# Altium PCB board.PcbDoc
Units mm, origin at the board's own origin, x right, y up, seen from the top; angles counter-clockwise.
Board outline 91.32 x 58.35 mm, 2 copper layers (Top Layer, Bottom Layer), stack 1.58 mm thick; 10 components, 8 nets, 62 pads, 1123 vias.
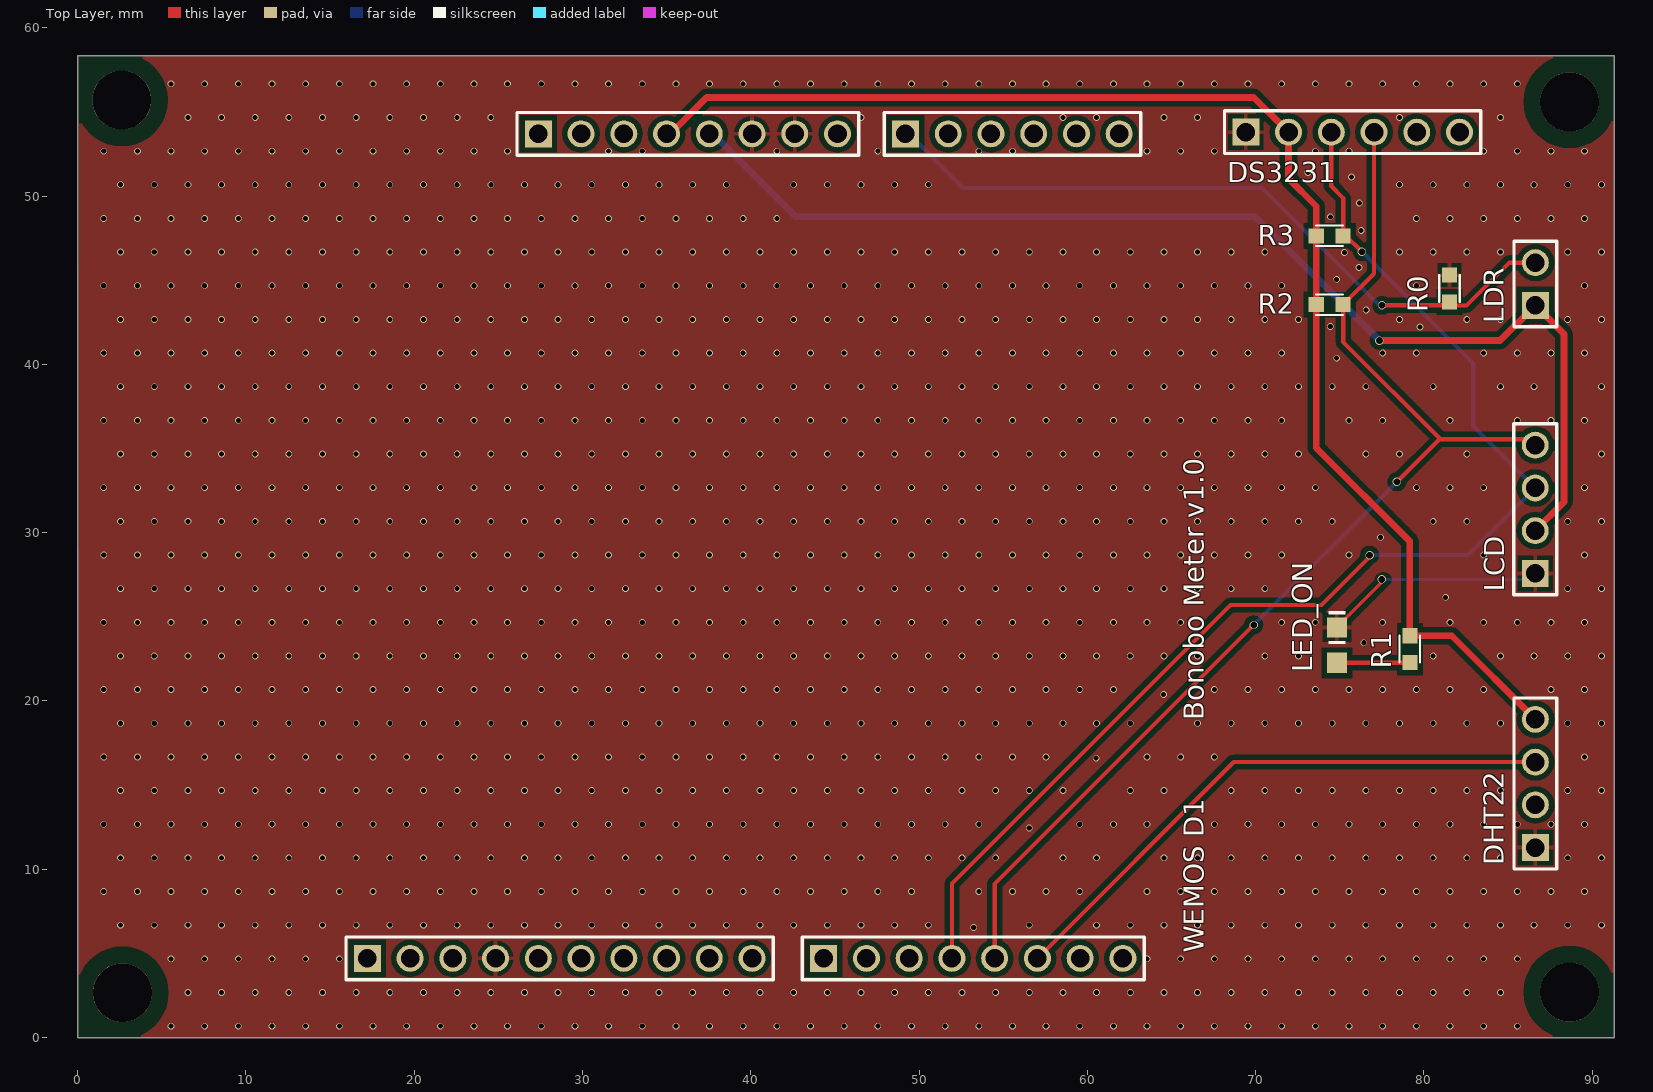
[diagram p0: Top Layer view]
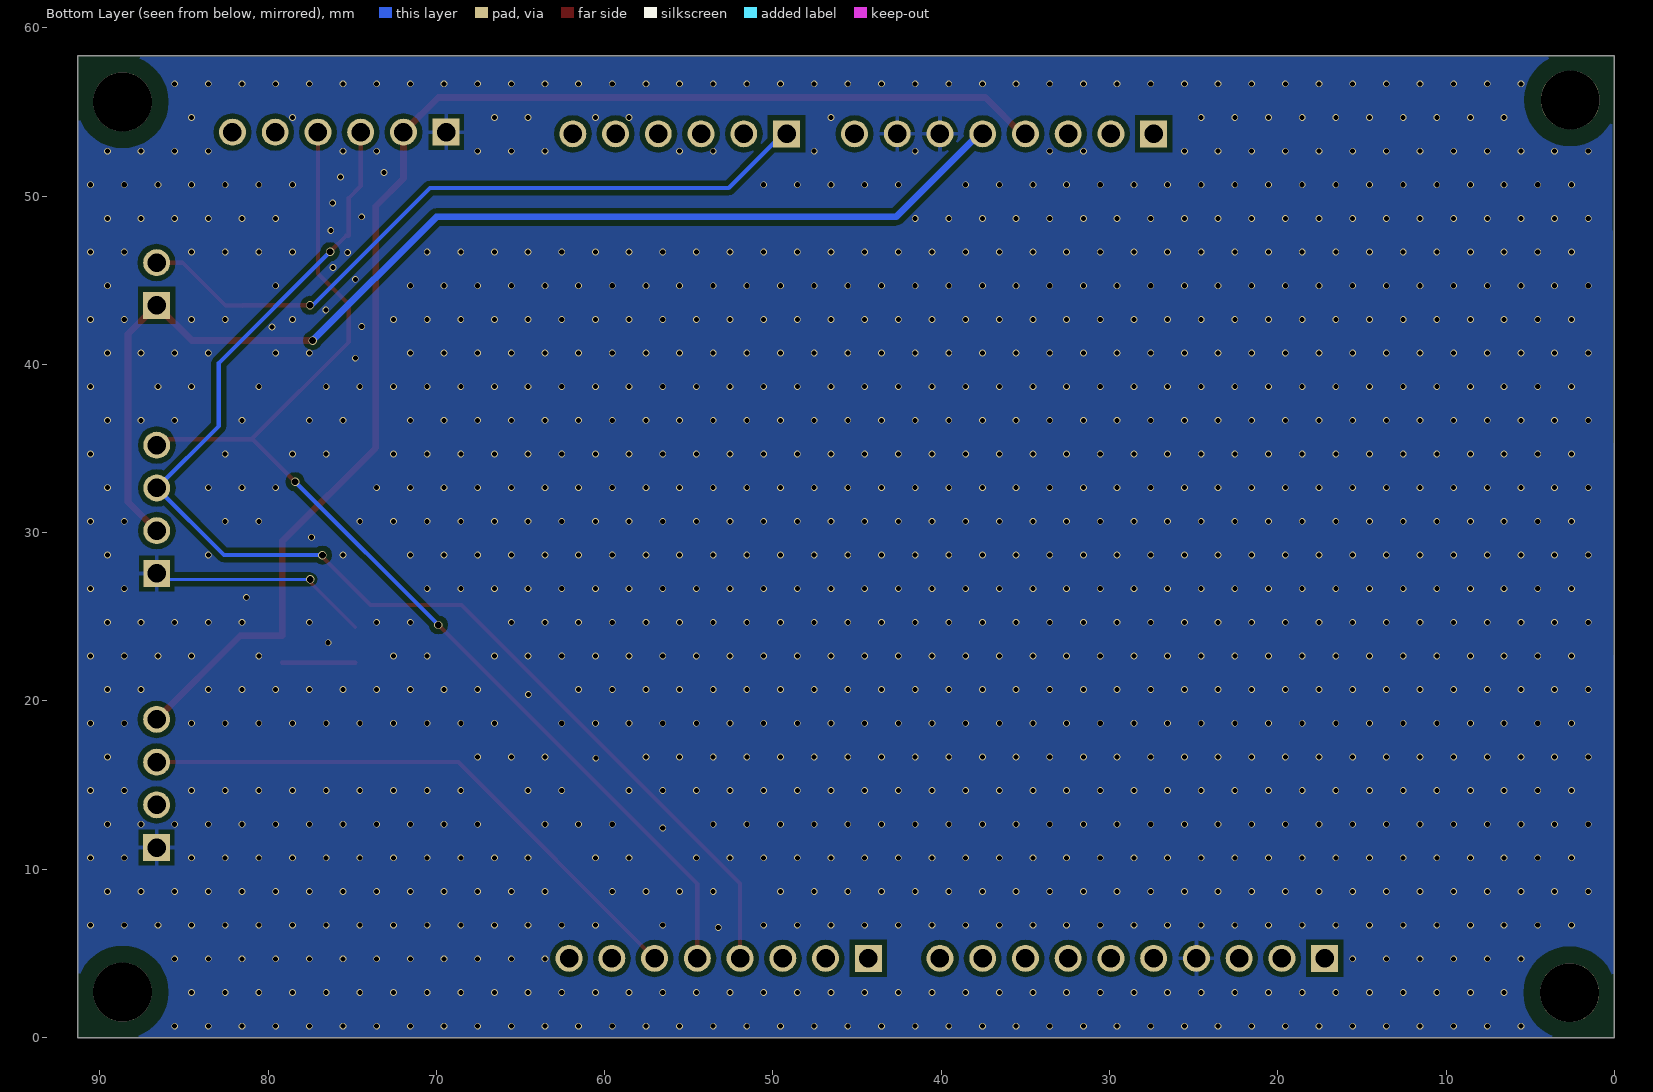
[diagram p1: Bottom Layer view, seen from below]

## Layer stack, top to bottom
Top Solder: solder mask 0.0102, Solder Resist, Dk 3.5
Top Layer: signal copper 0.0356
Dielectric 1: dielectric 1.5087, FR-4, Dk 4.8
Bottom Layer: signal copper 0.0356
Bottom Solder: solder mask 0.0102, Solder Resist, Dk 3.5

## Board outline
0,0 0,58.351 91.322,58.351 91.322,0

## Design rules (kind name [scope] priority, off if disabled: settings)
Clearance Clearance_Screw_Hole [HoleSize > 3] p1: gap=0.152 ignorepadtopadclearanceinfootprint=FALSE except(0.305: Arc-Poly Track-Poly SMDPad-Poly Via-Poly Fill-Poly Poly-Poly; 0.5: Poly-Hole; 1: THPad-Poly)
Clearance Clearance_Borders [OnLayer('Mechanical 1')] p2: gap=0.152 ignorepadtopadclearanceinfootprint=FALSE except(0.305: Arc-Poly Track-Poly SMDPad-Poly Via-Poly Fill-Poly Poly-Poly; 0.5: Poly-Hole; 1: THPad-Poly)
Clearance Clearance_RF [InNet('RF')] p3: gap=0.15 ignorepadtopadclearanceinfootprint=FALSE except(0: Arc-Hole Track-Hole SMDPad-Hole THPad-Hole Via-Hole Fill-Hole Poly-Hole Region-Hole Text-Hole; 0.4: Arc-Via Arc-Poly Track-Poly SMDPad-Poly THPad-Poly Via-Poly Fill-Poly Poly-Poly)
Clearance [All] p4: gap=0.152 ignorepadtopadclearanceinfootprint=FALSE except(0.305: Arc-Poly Track-Poly SMDPad-Poly THPad-Poly Via-Poly Fill-Poly Poly-Poly)
DiffPairsRouting [All] p1: maxlimit=0.254 minlimit=0.25 mostfreqgap=0.25 toplayer_minwidth=0.25 toplayer_maxwidth=0.25 toplayer_prefwidth=0.25 bottomlayer_minwidth=0.25 bottomlayer_maxwidth=0.25 bottomlayer_prefwidth=0.25 maxuncoupledlength=12.7
HoleSize [All] p1: absolutevalues=TRUE maxlimit=10 minlimit=0.025 maxpercent=80.000 minpercent=20.000
MinimumSolderMaskSliver [All] p1: minsoldermaskwidth=0.05
PlaneClearance PlaneClearance_RF [InNet('WLAN_RF')] p1: clearance=0.8
PlaneClearance [All] p2: clearance=0.5
PlaneConnect [All] p1: planeconnectstyle=Relief reliefexpansion=0.508 reliefentries=2 reliefconductorwidth=0.254 reliefairgap=0.254
PolygonConnect PolygonConnect_vias [All vs IsVia] p1: connectstyle=Direct reliefconductorwidth=0.254 reliefentries=4 polygonreliefangle="90 Angle" airgapwidth=0.254
PolygonConnect [All] p2: connectstyle=Relief reliefconductorwidth=0.25 reliefentries=4 polygonreliefangle="90 Angle" airgapwidth=0.25
RoutingVias [All] p1: holewidth=0.7 width=0.5 viastyle="Through Hole" minholewidth=0.3 minwidth=0.4 maxholewidth=0.4 maxwidth=0.8
SilkToSolderMaskClearance [IsPad] p1: minsilkscreentomaskgap=0 clearancetoexposedcopper=TRUE
SolderMaskExpansion SolderMaskExpansion_Vias [IsVia] p1: expansion=-10
SolderMaskExpansion [All] p2: expansion=0.1
UnpouredPolygon [All] p1: allowunpoured=TRUE allowshelved=TRUE
Width [All] p1: maxlimit=2 minlimit=0.1 preferedwidth=0.25 minimp=50.000000 maximp=50.000000 favimp=50.000000
23 further rules are at their usual default settings.

## Components (designator, comment, footprint, x,y, rotation, side; value= is the part's Value field where it differs from the comment)
DHT22 "04p" 61300411121 86.626,15.097 r90 top
DS3231 "06p" 61300611121 75.768,53.801 r0 top
LCD "04p" 61300411121 86.618,31.388 r90 top
LDR "02p" 61300211121 86.626,44.777 r90 top
LED_ON "" CHIPLED_0805 74.828,23.319 r0 top
R0 "R-US_R0603" R0603 81.519,44.504 r270 top value=5K
R1 "R-US_R0603" R0603 79.168,23.077 r90 top value=470
R2 "R-US_R0603" R0603 74.403,43.555 r180 top value=10K
R3 "R-US_R0603" R0603 74.403,47.64 r180 top value=10K
"WEMOS D1" "WEMOS D1" "WEMOS D1" 39.554,29.203 r0 top (schematic designator U0)

## Footprints (in the part's own frame and the unit in brackets; to place one, negate y for a bottom-side part, rotate by r counter-clockwise, add the part's x,y. Pads: shape width x height; smd on the part's side, far side on the other; paste and mask are expansions set on the pad)
61300211121 [mm] "2 pins, 1 row, straight, gold plating"
  rect 1.6x1.6 hole 1.1: 1(-1.27,0)
  round 1.6 hole 1.1: 2(1.27,0)
  silkscreen extent -2.54,-1.27 2.54,1.27, body extent -2.54,-1.27 2.54,1.27, height 8.57
61300411121 [mm] "4 pins, 1 row, straight, gold plating"
  rect 1.6x1.6 hole 1.1: 1(-3.81,0)
  round 1.6 hole 1.1: 2(-1.27,0) 3(1.27,0) 4(3.81,0)
  silkscreen extent -5.08,-1.27 5.08,1.27, body extent -5.08,-1.27 5.08,1.27, height 8.57
61300611121 [mm] "6 pins, 1 row, straight, gold plating"
  rect 1.6x1.6 hole 1.1: 1(-6.35,0)
  round 1.6 hole 1.1: 2(-3.81,0) 3(-1.27,0) 4(1.27,0) 5(3.81,0) 6(6.35,0)
  silkscreen extent -7.62,-1.27 7.62,1.27, body extent -7.62,-1.27 7.62,1.27, height 8.57
CHIPLED_0805 [mm]
  rect 1.2x1.2 smd: A(0,-1.05) C(0,1.05)
  silkscreen extent -0.51,0.05 0.51,2.03, body extent -0.63,-1 0.62,1, height 0.81
R0603 [mm]
  rect 0.9x0.9 smd: 1(-0.8,0) 2(0.8,0)
  silkscreen extent -0.8,-0.61 0.8,0.61, body extent -0.77,-0.42 0.78,0.43, height 0.45
"WEMOS D1" [mm] "WEMOS D1 R2 ESP8266 Board"
  rect 1.6x1.6 hole 1.1: 1(-12.18,24.5) 9(9.64,24.5) 15(-22.34,-24.5) 25(4.78,-24.5)
  round 1.6 hole 1.1: 2(-9.64,24.5) 3(-7.1,24.5) 4(-4.56,24.5) 5(-2.02,24.5) 6(0.52,24.5) 7(3.06,24.5) 8(5.6,24.5) 10(12.18,24.5) 11(14.72,24.5) 12(17.26,24.5) 13(19.8,24.5) 14(22.34,24.5) 16(-19.8,-24.5) 17(-17.26,-24.5) 18(-14.72,-24.5) 19(-12.18,-24.5) 20(-9.64,-24.5) 21(-7.1,-24.5) 22(-4.56,-24.5) 23(-2.02,-24.5) 24(0.52,-24.5) 26(7.32,-24.5) 27(9.86,-24.5) 28(12.4,-24.5) 29(14.94,-24.5) 30(17.48,-24.5) 31(20.02,-24.5) 32(22.56,-24.5)
  silkscreen extent -23.61,-25.77 23.83,25.77, body extent -23.61,-25.77 23.83,25.77, height 8.57

## Part data
DHT22 LCD: library part 61300411121, "WR-PHD 2.54 mm THT Pin Header, 04p", Part Number=61300411121, Vendor="Wurth Elektronik"
DS3231: library part 61300611121, "WR-PHD 2.54 mm THT Pin Header, 06p", Part Number=61300611121, Vendor="Wurth Elektronik"
LDR: library part 61300211121, "WR-PHD 2.54 mm THT Pin Header, 02p", Part Number=61300211121, Vendor="Wurth Elektronik"
LED_ON: library part LEDCHIPLED_0805, Colour=Vermelho, Part Number=AP2012EC, Família=LEDs, Vendor=Kingbright
R0 R1 R2 R3: Part Number=RC0603FR-07470RL, Família=Resistores, Vendor=Yageo
"WEMOS D1": "Arduino UNO Compatible wifi board based on ESP8266EX", Part Number="WEMOS D1"

## Free pads (board coordinates)
  round 3.5 hole 3.5: ""(2.62,55.715) ""(2.657,2.66) ""(88.653,2.697) ""(88.653,55.603)

## Via types
v1: diameter 0.4, hole 0.3, Top Layer to Bottom Layer, tented both sides, 1116 vias
v2: diameter 0.5, hole 0.4, Top Layer to Bottom Layer, 7 vias

## Nets (pads, with @x,y where several pads share a name; then routed paths per layer and width w, separated by ;. In a path a pad name is that pad's centre, name@x,y a point inside that pad or via, vN(x,y) a via of type N, cw(c..) or ccw(c..) an arc to the next point about the centre after c; other vN are vias at no path point)
+3V3: "WEMOS D1.4" DHT22.4 DS3231.2 R1.2 R2.2 R3.2 | length 80.9
  Top Layer w0.4: 35.214,53.703 37.379,55.867 69.892,55.867 DS3231.2 71.958,51.042 73.603,49.396 R3.2 R2.2 73.603,35.044 79.168,29.479 R1.2 81.656,23.877 DHT22.4
+5V: "WEMOS D1.5" LCD.2 LDR.1 | length 69.6
  Top Layer w0.4: v2(77.357,41.414) 84.534,41.414 LDR.1 88.323,41.81 88.323,31.824 LCD.2
  Bottom Layer w0.4: 37.754,53.703 42.69,48.767 70.004,48.767 v2(77.357,41.414)
DHT_DATA: "WEMOS D1.30" DHT22.3 | length 34.4
  Top Layer w0.25: 57.034,4.703 68.698,16.367 DHT22.3
GND: "WEMOS D1.6" "WEMOS D1.7" "WEMOS D1.18" DHT22.1 DS3231.1 LCD.1 LED_ON.C R0.1 | length 13.5
  Top Layer w0.2: LED_ON.C 77.68,27.221 v2(77.494,27.221)
  Bottom Layer w0.2: v2(77.494,27.221) 86.261,27.221 LCD.1
  other v1: 5.55,0.675 7.55,0.675 9.55,0.675 11.55,0.675 13.55,0.675 15.55,0.675 17.55,0.675 19.55,0.675 21.55,0.675 23.55,0.675 25.55,0.675 27.55,0.675 29.55,0.675 31.55,0.675 33.55,0.675 35.55,0.675 37.55,0.675 39.55,0.675 41.55,0.675 43.55,0.675 45.55,0.675 47.55,0.675 49.55,0.675 51.55,0.675 53.55,0.675 55.55,0.675 57.55,0.675 59.55,0.675 61.55,0.675 63.55,0.675 65.55,0.675 67.55,0.675 69.55,0.675 71.55,0.675 73.55,0.675 75.55,0.675 77.55,0.675 79.55,0.675 81.55,0.675 83.55,0.675 85.55,0.675 6.55,2.675 8.55,2.675 10.55,2.675 12.55,2.675 14.55,2.675 16.55,2.675 18.55,2.675 20.55,2.675 22.55,2.675 24.55,2.675 26.55,2.675 28.55,2.675 30.55,2.675 32.55,2.675 34.55,2.675 36.55,2.675 38.55,2.675 40.55,2.675 42.55,2.675 44.55,2.675 46.55,2.675 48.55,2.675 50.55,2.675 52.55,2.675 54.55,2.675 56.55,2.675 58.55,2.675 60.55,2.675 62.55,2.675 64.55,2.675 66.55,2.675 68.55,2.675 70.55,2.675 72.55,2.675 74.55,2.675 76.55,2.675 78.55,2.675 80.55,2.675 82.55,2.675 84.55,2.675 5.55,4.675 7.55,4.675 9.55,4.675 11.55,4.675 13.55,4.675 15.55,4.675 63.55,4.675 65.55,4.675 67.55,4.675 69.55,4.675 71.55,4.675 73.55,4.675 75.55,4.675 77.55,4.675 79.55,4.675 81.55,4.675 83.55,4.675 85.55,4.675 53.25,6.537 2.55,6.675 4.55,6.675 6.55,6.675 8.55,6.675 10.55,6.675 12.55,6.675 14.55,6.675 16.55,6.675 18.55,6.675 20.55,6.675 22.55,6.675 24.55,6.675 26.55,6.675 28.55,6.675 30.55,6.675 32.55,6.675 34.55,6.675 36.55,6.675 38.55,6.675 40.55,6.675 42.55,6.675 44.55,6.675 46.55,6.675 48.55,6.675 50.55,6.675 56.55,6.675 60.55,6.675 62.55,6.675 64.55,6.675 66.55,6.675 68.55,6.675 70.55,6.675 72.55,6.675 74.55,6.675 76.55,6.675 78.55,6.675 80.55,6.675 82.55,6.675 84.55,6.675 86.55,6.675 88.55,6.675 90.55,6.675 1.55,8.675 3.55,8.675 5.55,8.675 7.55,8.675 9.55,8.675 11.55,8.675 13.55,8.675 15.55,8.675 17.55,8.675 19.55,8.675 21.55,8.675 23.55,8.675 25.55,8.675 27.55,8.675 29.55,8.675 31.55,8.675 33.55,8.675 35.55,8.675 37.55,8.675 39.55,8.675 41.55,8.675 43.55,8.675 45.55,8.675 47.55,8.675 49.55,8.675 53.55,8.675 55.55,8.675 57.55,8.675 59.55,8.675 63.55,8.675 65.55,8.675 67.55,8.675 69.55,8.675 71.55,8.675 73.55,8.675 75.55,8.675 77.55,8.675 79.55,8.675 81.55,8.675 83.55,8.675 85.55,8.675 87.55,8.675 89.55,8.675 2.55,10.675 4.55,10.675 6.55,10.675 8.55,10.675 10.55,10.675 12.55,10.675 14.55,10.675 16.55,10.675 18.55,10.675 20.55,10.675 22.55,10.675 24.55,10.675 26.55,10.675 28.55,10.675 30.55,10.675 32.55,10.675 34.55,10.675 36.55,10.675 38.55,10.675 40.55,10.675 42.55,10.675 44.55,10.675 46.55,10.675 48.55,10.675 50.55,10.675 52.55,10.675 54.55,10.675 58.55,10.675 60.55,10.675 64.55,10.675 66.55,10.675 68.55,10.675 70.55,10.675 72.55,10.675 74.55,10.675 76.55,10.675 78.55,10.675 80.55,10.675 82.55,10.675 84.55,10.675 88.55,10.675 90.55,10.675 56.549,12.457 1.55,12.675 3.55,12.675 5.55,12.675 7.55,12.675 9.55,12.675 11.55,12.675 13.55,12.675 15.55,12.675 17.55,12.675 19.55,12.675 21.55,12.675 23.55,12.675 25.55,12.675 27.55,12.675 29.55,12.675 31.55,12.675 33.55,12.675 35.55,12.675 37.55,12.675 39.55,12.675 41.55,12.675 43.55,12.675 45.55,12.675 47.55,12.675 49.55,12.675 51.55,12.675 53.55,12.675 59.55,12.675 61.55,12.675 63.55,12.675 67.55,12.675 69.55,12.675 71.55,12.675 73.55,12.675 75.55,12.675 77.55,12.675 79.55,12.675 81.55,12.675 83.55,12.675 85.55,12.675 87.55,12.675 89.55,12.675 2.55,14.675 4.55,14.675 6.55,14.675 8.55,14.675 10.55,14.675 12.55,14.675 14.55,14.675 16.55,14.675 18.55,14.675 20.55,14.675 22.55,14.675 24.55,14.675 26.55,14.675 28.55,14.675 30.55,14.675 32.55,14.675 34.55,14.675 36.55,14.675 38.55,14.675 40.55,14.675 42.55,14.675 44.55,14.675 46.55,14.675 48.55,14.675 50.55,14.675 52.55,14.675 54.55,14.675 56.55,14.675 58.55,14.675 62.55,14.675 64.55,14.675 68.55,14.675 70.55,14.675 72.55,14.675 74.55,14.675 76.55,14.675 78.55,14.675 80.55,14.675 82.55,14.675 84.55,14.675 88.55,14.675 90.55,14.675 60.528,16.598 1.55,16.675 3.55,16.675 5.55,16.675 7.55,16.675 9.55,16.675 11.55,16.675 13.55,16.675 15.55,16.675 17.55,16.675 19.55,16.675 21.55,16.675 23.55,16.675 25.55,16.675 27.55,16.675 29.55,16.675 31.55,16.675 33.55,16.675 35.55,16.675 37.55,16.675 39.55,16.675 41.55,16.675 43.55,16.675 45.55,16.675 47.55,16.675 49.55,16.675 51.55,16.675 53.55,16.675 55.55,16.675 57.55,16.675 63.55,16.675 65.55,16.675 67.55,16.675 89.55,16.675 2.55,18.675 4.55,18.675 6.55,18.675 8.55,18.675 10.55,18.675 12.55,18.675 14.55,18.675 16.55,18.675 18.55,18.675 20.55,18.675 22.55,18.675 24.55,18.675 26.55,18.675 28.55,18.675 30.55,18.675 32.55,18.675 34.55,18.675 36.55,18.675 38.55,18.675 40.55,18.675 42.55,18.675 44.55,18.675 46.55,18.675 48.55,18.675 50.55,18.675 52.55,18.675 54.55,18.675 56.55,18.675 58.55,18.675 60.55,18.675 62.55,18.675 66.55,18.675 68.55,18.675 70.55,18.675 72.55,18.675 74.55,18.675 76.55,18.675 78.55,18.675 80.55,18.675 82.55,18.675 84.55,18.675 88.55,18.675 90.55,18.675 64.539,20.383 1.55,20.675 3.55,20.675 5.55,20.675 7.55,20.675 9.55,20.675 11.55,20.675 13.55,20.675 15.55,20.675 17.55,20.675 19.55,20.675 21.55,20.675 23.55,20.675 25.55,20.675 27.55,20.675 29.55,20.675 31.55,20.675 33.55,20.675 35.55,20.675 37.55,20.675 39.55,20.675 41.55,20.675 43.55,20.675 45.55,20.675 47.55,20.675 49.55,20.675 51.55,20.675 53.55,20.675 55.55,20.675 57.55,20.675 59.55,20.675 61.55,20.675 67.55,20.675 69.55,20.675 71.55,20.675 73.55,20.675 75.55,20.675 77.55,20.675 79.55,20.675 81.55,20.675 83.55,20.675 87.55,20.675 89.55,20.675 2.55,22.675 4.55,22.675 6.55,22.675 8.55,22.675 10.55,22.675 12.55,22.675 14.55,22.675 16.55,22.675 18.55,22.675 20.55,22.675 22.55,22.675 24.55,22.675 26.55,22.675 28.55,22.675 30.55,22.675 32.55,22.675 34.55,22.675 36.55,22.675 38.55,22.675 40.55,22.675 42.55,22.675 44.55,22.675 46.55,22.675 48.55,22.675 50.55,22.675 52.55,22.675 54.55,22.675 56.55,22.675 58.55,22.675 60.55,22.675 62.55,22.675 64.55,22.675 66.55,22.675 70.55,22.675 72.55,22.675 80.55,22.675 84.55,22.675 86.55,22.675 88.55,22.675 90.55,22.675 76.432,23.46 1.55,24.675 3.55,24.675 5.55,24.675 7.55,24.675 9.55,24.675 11.55,24.675 13.55,24.675 15.55,24.675 17.55,24.675 19.55,24.675 21.55,24.675 23.55,24.675 25.55,24.675 27.55,24.675 29.55,24.675 31.55,24.675 33.55,24.675 35.55,24.675 37.55,24.675 39.55,24.675 41.55,24.675 43.55,24.675 45.55,24.675 47.55,24.675 49.55,24.675 51.55,24.675 53.55,24.675 55.55,24.675 57.55,24.675 59.55,24.675 61.55,24.675 63.55,24.675 65.55,24.675 71.55,24.675 73.55,24.675 77.55,24.675 81.55,24.675 83.55,24.675 85.55,24.675 87.55,24.675 89.55,24.675 81.293,26.158 2.55,26.675 4.55,26.675 6.55,26.675 8.55,26.675 10.55,26.675 12.55,26.675 14.55,26.675 16.55,26.675 18.55,26.675 20.55,26.675 22.55,26.675 24.55,26.675 26.55,26.675 28.55,26.675 30.55,26.675 32.55,26.675 34.55,26.675 36.55,26.675 38.55,26.675 40.55,26.675 42.55,26.675 44.55,26.675 46.55,26.675 48.55,26.675 50.55,26.675 52.55,26.675 54.55,26.675 56.55,26.675 58.55,26.675 60.55,26.675 62.55,26.675 64.55,26.675 66.55,26.675 68.55,26.675 70.55,26.675 88.55,26.675 90.55,26.675 1.55,28.675 3.55,28.675 5.55,28.675 7.55,28.675 9.55,28.675 11.55,28.675 13.55,28.675 15.55,28.675 17.55,28.675 19.55,28.675 21.55,28.675 23.55,28.675 25.55,28.675 27.55,28.675 29.55,28.675 31.55,28.675 33.55,28.675 35.55,28.675 37.55,28.675 39.55,28.675 41.55,28.675 43.55,28.675 45.55,28.675 47.55,28.675 49.55,28.675 51.55,28.675 53.55,28.675 55.55,28.675 57.55,28.675 59.55,28.675 61.55,28.675 63.55,28.675 65.55,28.675 67.55,28.675 69.55,28.675 71.55,28.675 75.55,28.675 83.55,28.675 89.55,28.675 77.428,29.73 2.55,30.675 4.55,30.675 6.55,30.675 8.55,30.675 10.55,30.675 12.55,30.675 14.55,30.675 16.55,30.675 18.55,30.675 20.55,30.675 22.55,30.675 24.55,30.675 26.55,30.675 28.55,30.675 30.55,30.675 32.55,30.675 34.55,30.675 36.55,30.675 38.55,30.675 40.55,30.675 42.55,30.675 44.55,30.675 46.55,30.675 48.55,30.675 50.55,30.675 52.55,30.675 54.55,30.675 56.55,30.675 58.55,30.675 60.55,30.675 62.55,30.675 64.55,30.675 66.55,30.675 68.55,30.675 70.55,30.675 72.55,30.675 74.55,30.675 80.55,30.675 82.55,30.675 88.55,30.675 90.55,30.675 1.55,32.675 3.55,32.675 5.55,32.675 7.55,32.675 9.55,32.675 11.55,32.675 13.55,32.675 15.55,32.675 17.55,32.675 19.55,32.675 21.55,32.675 23.55,32.675 25.55,32.675 27.55,32.675 29.55,32.675 31.55,32.675 33.55,32.675 35.55,32.675 37.55,32.675 39.55,32.675 41.55,32.675 43.55,32.675 45.55,32.675 47.55,32.675 49.55,32.675 51.55,32.675 53.55,32.675 55.55,32.675 57.55,32.675 59.55,32.675 61.55,32.675 63.55,32.675 65.55,32.675 67.55,32.675 69.55,32.675 71.55,32.675 73.55,32.675 79.55,32.675 81.55,32.675 83.55,32.675 89.55,32.675 2.55,34.675 4.55,34.675 6.55,34.675 8.55,34.675 10.55,34.675 12.55,34.675 14.55,34.675 16.55,34.675 18.55,34.675 20.55,34.675 22.55,34.675 24.55,34.675 26.55,34.675 28.55,34.675 30.55,34.675 32.55,34.675 34.55,34.675 36.55,34.675 38.55,34.675 40.55,34.675 42.55,34.675 44.55,34.675 46.55,34.675 48.55,34.675 50.55,34.675 52.55,34.675 54.55,34.675 56.55,34.675 58.55,34.675 60.55,34.675 62.55,34.675 64.55,34.675 66.55,34.675 68.55,34.675 70.55,34.675 72.55,34.675 76.55,34.675 78.55,34.675 82.55,34.675 90.55,34.675 1.55,36.675 3.55,36.675 5.55,36.675 7.55,36.675 9.55,36.675 11.55,36.675 13.55,36.675 15.55,36.675 17.55,36.675 19.55,36.675 21.55,36.675 23.55,36.675 25.55,36.675 27.55,36.675 29.55,36.675 31.55,36.675 33.55,36.675 35.55,36.675 37.55,36.675 39.55,36.675 41.55,36.675 43.55,36.675 45.55,36.675 47.55,36.675 49.55,36.675 51.55,36.675 53.55,36.675 55.55,36.675 57.55,36.675 59.55,36.675 61.55,36.675 63.55,36.675 65.55,36.675 67.55,36.675 69.55,36.675 71.55,36.675 75.55,36.675 77.55,36.675 81.55,36.675 85.55,36.675 87.55,36.675 89.55,36.675 2.55,38.675 4.55,38.675 6.55,38.675 8.55,38.675 10.55,38.675 12.55,38.675 14.55,38.675 16.55,38.675 18.55,38.675 20.55,38.675 22.55,38.675 24.55,38.675 26.55,38.675 28.55,38.675 30.55,38.675 32.55,38.675 34.55,38.675 36.55,38.675 38.55,38.675 40.55,38.675 42.55,38.675 44.55,38.675 46.55,38.675 48.55,38.675 50.55,38.675 52.55,38.675 54.55,38.675 56.55,38.675 58.55,38.675 60.55,38.675 62.55,38.675 64.55,38.675 66.55,38.675 68.55,38.675 70.55,38.675 72.55,38.675 74.55,38.675 76.55,38.675 80.55,38.675 84.55,38.675 86.55,38.675 90.55,38.675 74.819,40.371 1.55,40.675 3.55,40.675 5.55,40.675 7.55,40.675 9.55,40.675 11.55,40.675 13.55,40.675 15.55,40.675 17.55,40.675 19.55,40.675 21.55,40.675 23.55,40.675 25.55,40.675 27.55,40.675 29.55,40.675 31.55,40.675 33.55,40.675 35.55,40.675 37.55,40.675 39.55,40.675 41.55,40.675 43.55,40.675 45.55,40.675 47.55,40.675 49.55,40.675 51.55,40.675 53.55,40.675 55.55,40.675 57.55,40.675 59.55,40.675 61.55,40.675 63.55,40.675 65.55,40.675 67.55,40.675 69.55,40.675 71.55,40.675 77.55,40.675 79.55,40.675 83.55,40.675 85.55,40.675 87.55,40.675 89.55,40.675 79.775,42.218 74.437,42.259 2.55,42.675 4.55,42.675 6.55,42.675 8.55,42.675 10.55,42.675 12.55,42.675 14.55,42.675 16.55,42.675 18.55,42.675 20.55,42.675 22.55,42.675 24.55,42.675 26.55,42.675 28.55,42.675 30.55,42.675 32.55,42.675 34.55,42.675 36.55,42.675 38.55,42.675 40.55,42.675 42.55,42.675 44.55,42.675 46.55,42.675 48.55,42.675 50.55,42.675 52.55,42.675 54.55,42.675 56.55,42.675 58.55,42.675 60.55,42.675 62.55,42.675 64.55,42.675 66.55,42.675 68.55,42.675 70.55,42.675 72.55,42.675 78.55,42.675 82.55,42.675 84.55,42.675 88.55,42.675 90.55,42.675 76.573,43.228 1.55,44.675 3.55,44.675 5.55,44.675 7.55,44.675 9.55,44.675 11.55,44.675 13.55,44.675 15.55,44.675 17.55,44.675 19.55,44.675 21.55,44.675 23.55,44.675 25.55,44.675 27.55,44.675 29.55,44.675 31.55,44.675 33.55,44.675 35.55,44.675 37.55,44.675 39.55,44.675 41.55,44.675 43.55,44.675 45.55,44.675 47.55,44.675 49.55,44.675 51.55,44.675 53.55,44.675 55.55,44.675 57.55,44.675 59.55,44.675 61.55,44.675 63.55,44.675 65.55,44.675 67.55,44.675 69.55,44.675 71.55,44.675 79.55,44.675 89.55,44.675 74.82,45.058 76.15,45.757 75.272,46.649 2.55,46.675 4.55,46.675 6.55,46.675 8.55,46.675 10.55,46.675 12.55,46.675 14.55,46.675 16.55,46.675 18.55,46.675 20.55,46.675 22.55,46.675 24.55,46.675 26.55,46.675 28.55,46.675 30.55,46.675 32.55,46.675 34.55,46.675 36.55,46.675 38.55,46.675 40.55,46.675 42.55,46.675 44.55,46.675 46.55,46.675 48.55,46.675 50.55,46.675 52.55,46.675 54.55,46.675 56.55,46.675 58.55,46.675 60.55,46.675 62.55,46.675 64.55,46.675 66.55,46.675 68.55,46.675 70.55,46.675 78.55,46.675 80.55,46.675 82.55,46.675 84.55,46.675 88.55,46.675 90.55,46.675 76.273,47.952 1.55,48.675 3.55,48.675 5.55,48.675 7.55,48.675 9.55,48.675 11.55,48.675 13.55,48.675 15.55,48.675 17.55,48.675 19.55,48.675 21.55,48.675 23.55,48.675 25.55,48.675 27.55,48.675 29.55,48.675 31.55,48.675 33.55,48.675 35.55,48.675 37.55,48.675 39.55,48.675 41.55,48.675 79.55,48.675 81.55,48.675 83.55,48.675 85.55,48.675 87.55,48.675 89.55,48.675 74.439,48.769 76.162,49.587 2.55,50.675 4.55,50.675 6.55,50.675 8.55,50.675 10.55,50.675 12.55,50.675 14.55,50.675 16.55,50.675 18.55,50.675 20.55,50.675 22.55,50.675 24.55,50.675 26.55,50.675 28.55,50.675 30.55,50.675 32.55,50.675 34.55,50.675 36.55,50.675 38.55,50.675 42.55,50.675 44.55,50.675 46.55,50.675 48.55,50.675 50.55,50.675 78.55,50.675 80.55,50.675 82.55,50.675 84.55,50.675 86.55,50.675 88.55,50.675 90.55,50.675 75.698,51.133 73.113,51.398 1.55,52.675 3.55,52.675 5.55,52.675 7.55,52.675 9.55,52.675 11.55,52.675 13.55,52.675 15.55,52.675 17.55,52.675 19.55,52.675 21.55,52.675 23.55,52.675 25.55,52.675 31.55,52.675 33.55,52.675 41.55,52.675 47.55,52.675 53.55,52.675 55.55,52.675 63.55,52.675 65.55,52.675 67.55,52.675 73.55,52.675 75.55,52.675 83.55,52.675 85.55,52.675 87.55,52.675 89.55,52.675 6.55,54.675 8.55,54.675 10.55,54.675 12.55,54.675 14.55,54.675 16.55,54.675 18.55,54.675 20.55,54.675 22.55,54.675 24.55,54.675 46.55,54.675 58.55,54.675 60.55,54.675 64.55,54.675 66.55,54.675 78.55,54.675 84.55,54.675 5.55,56.675 7.55,56.675 9.55,56.675 11.55,56.675 13.55,56.675 15.55,56.675 17.55,56.675 19.55,56.675 21.55,56.675 23.55,56.675 25.55,56.675 27.55,56.675 29.55,56.675 31.55,56.675 33.55,56.675 35.55,56.675 37.55,56.675 39.55,56.675 41.55,56.675 43.55,56.675 45.55,56.675 47.55,56.675 49.55,56.675 51.55,56.675 53.55,56.675 55.55,56.675 57.55,56.675 59.55,56.675 61.55,56.675 63.55,56.675 65.55,56.675 67.55,56.675 69.55,56.675 71.55,56.675 73.55,56.675 75.55,56.675 77.55,56.675 79.55,56.675 81.55,56.675 83.55,56.675 85.55,56.675
LDR_ANA: "WEMOS D1.9" LDR.2 R0.2 | length 42.6
  Top Layer w0.25: v2(77.512,43.51) 81.497,43.51 81.52,43.488 81.556,43.494 82.541,43.494 85.094,46.047 LDR.2
  Bottom Layer w0.25: 49.414,53.703 52.628,50.489 70.371,50.489 77.451,43.409 77.512,43.471 v2(77.512,43.51)
NetLED_ON_A: LED_ON.A R1.1 | length 4.3
  Top Layer w0.25: LED_ON.A 74.836,22.277 R1.1
SCL: "WEMOS D1.29" DS3231.4 LCD.4 R2.1 | length 69
  Top Layer w0.25: 54.494,4.703 54.494,9.126 v2(69.883,24.515) ; DS3231.4 77.038,45.39 R2.1 75.203,41.34 80.993,35.55 ; v2(78.396,33.028) 80.917,35.55 80.993,35.55 ; LCD.4 86.266,35.55 80.993,35.55
  Bottom Layer w0.25: v2(69.883,24.515) v2(78.396,33.028)
SDA: "WEMOS D1.28" DS3231.3 LCD.3 R3.1 | length 75.4
  Top Layer w0.25: 51.954,4.703 51.954,9.148 68.504,25.697 73.923,25.697 76.892,28.667 v2(76.772,28.667) ; DS3231.3 74.498,50.6 75.203,49.894 R3.1 75.374,47.64 v2(76.318,46.696)
  Bottom Layer w0.25: v2(76.318,46.696) 82.928,40.086 82.928,36.348 LCD.3 82.626,28.667 v2(76.772,28.667)
pads on no net: "WEMOS D1.1" "WEMOS D1.2" "WEMOS D1.3" "WEMOS D1.8" "WEMOS D1.10" "WEMOS D1.11" "WEMOS D1.12" "WEMOS D1.13" "WEMOS D1.14" "WEMOS D1.15" "WEMOS D1.16" "WEMOS D1.17" "WEMOS D1.19" "WEMOS D1.20" "WEMOS D1.21" "WEMOS D1.22" "WEMOS D1.23" "WEMOS D1.24" "WEMOS D1.25" "WEMOS D1.26" "WEMOS D1.27" "WEMOS D1.31" "WEMOS D1.32" DHT22.2 DS3231.5 DS3231.6

## Polygon pours and split planes (outlines as drawn)
GND on Top Layer "Ground Plane Top" (solid, pour order 0): 0.118,58.232 0.194,58.308 91.286,58.308 91.286,0.018 91.263,-0.004 91.246,0.014 0.019,0.014 0.019,3.612 -0.004,3.635
GND on Bottom Layer "Ground Plane Top" (solid, pour order 2): 0.134,58.207 0.21,58.282 91.303,58.282 91.303,-0.007 91.28,-0.03 91.262,-0.012 0.036,-0.012 0.036,3.586 0.013,3.61

## Silkscreen, mask and mechanical layers (free items; w line width, h text height)
Top Overlay:
  text "Bonobo Meter v1.0" at 66.922,18.851 h1.2 r90
Mechanical 1:
  the board outline again, w0.127